# Altium PCB Copy of smarmcuPcb.PcbDoc
Units mil, origin at the board's own origin, x right, y up, seen from the top; angles counter-clockwise.
Board outline 2370 x 1812 mil, 4 copper layers (Top Layer, GND_layer, 3.3V_layer, Bottom Layer), stack 23.756 mil thick; 88 components, 65 nets, 255 pads, 78 vias.
Unrouted connection lines stored in the file: 43.
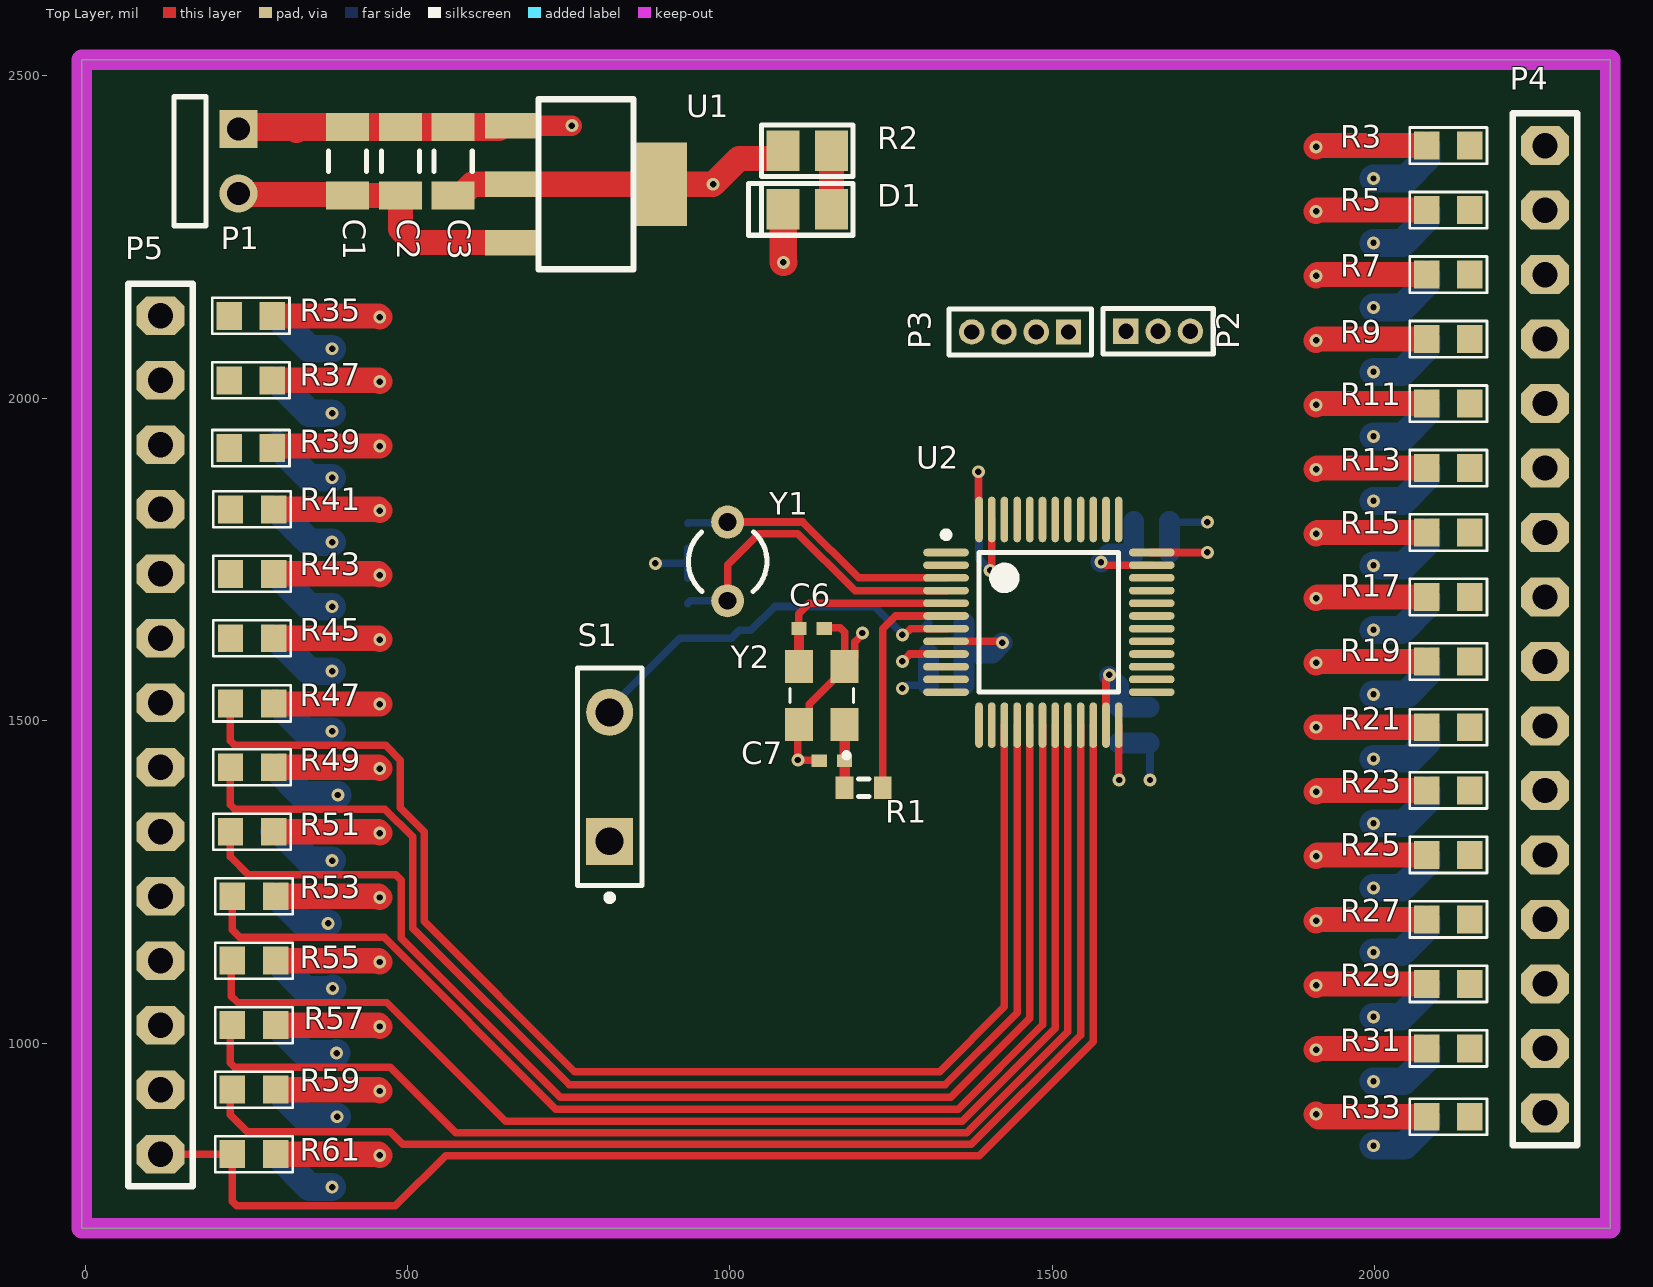
[diagram p0: Top Layer view]
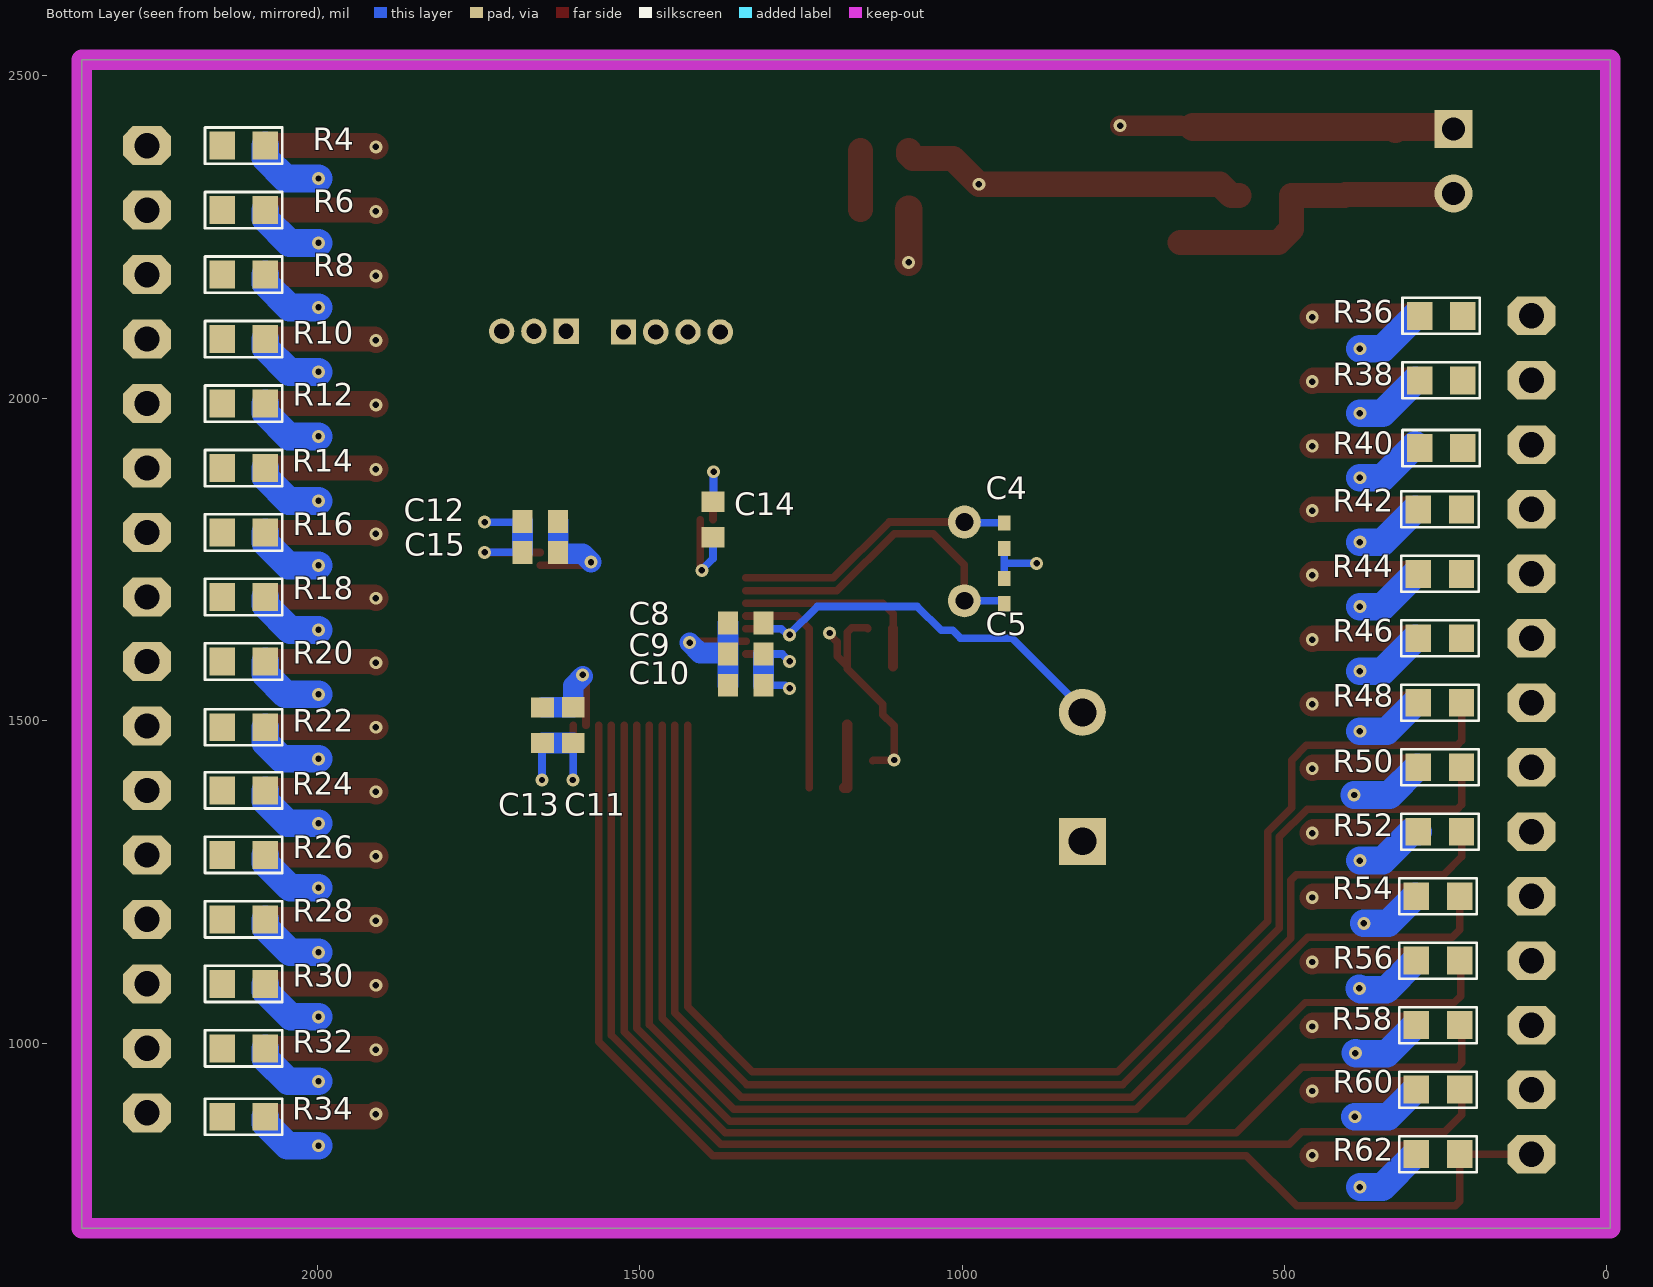
[diagram p1: Bottom Layer view, seen from below]
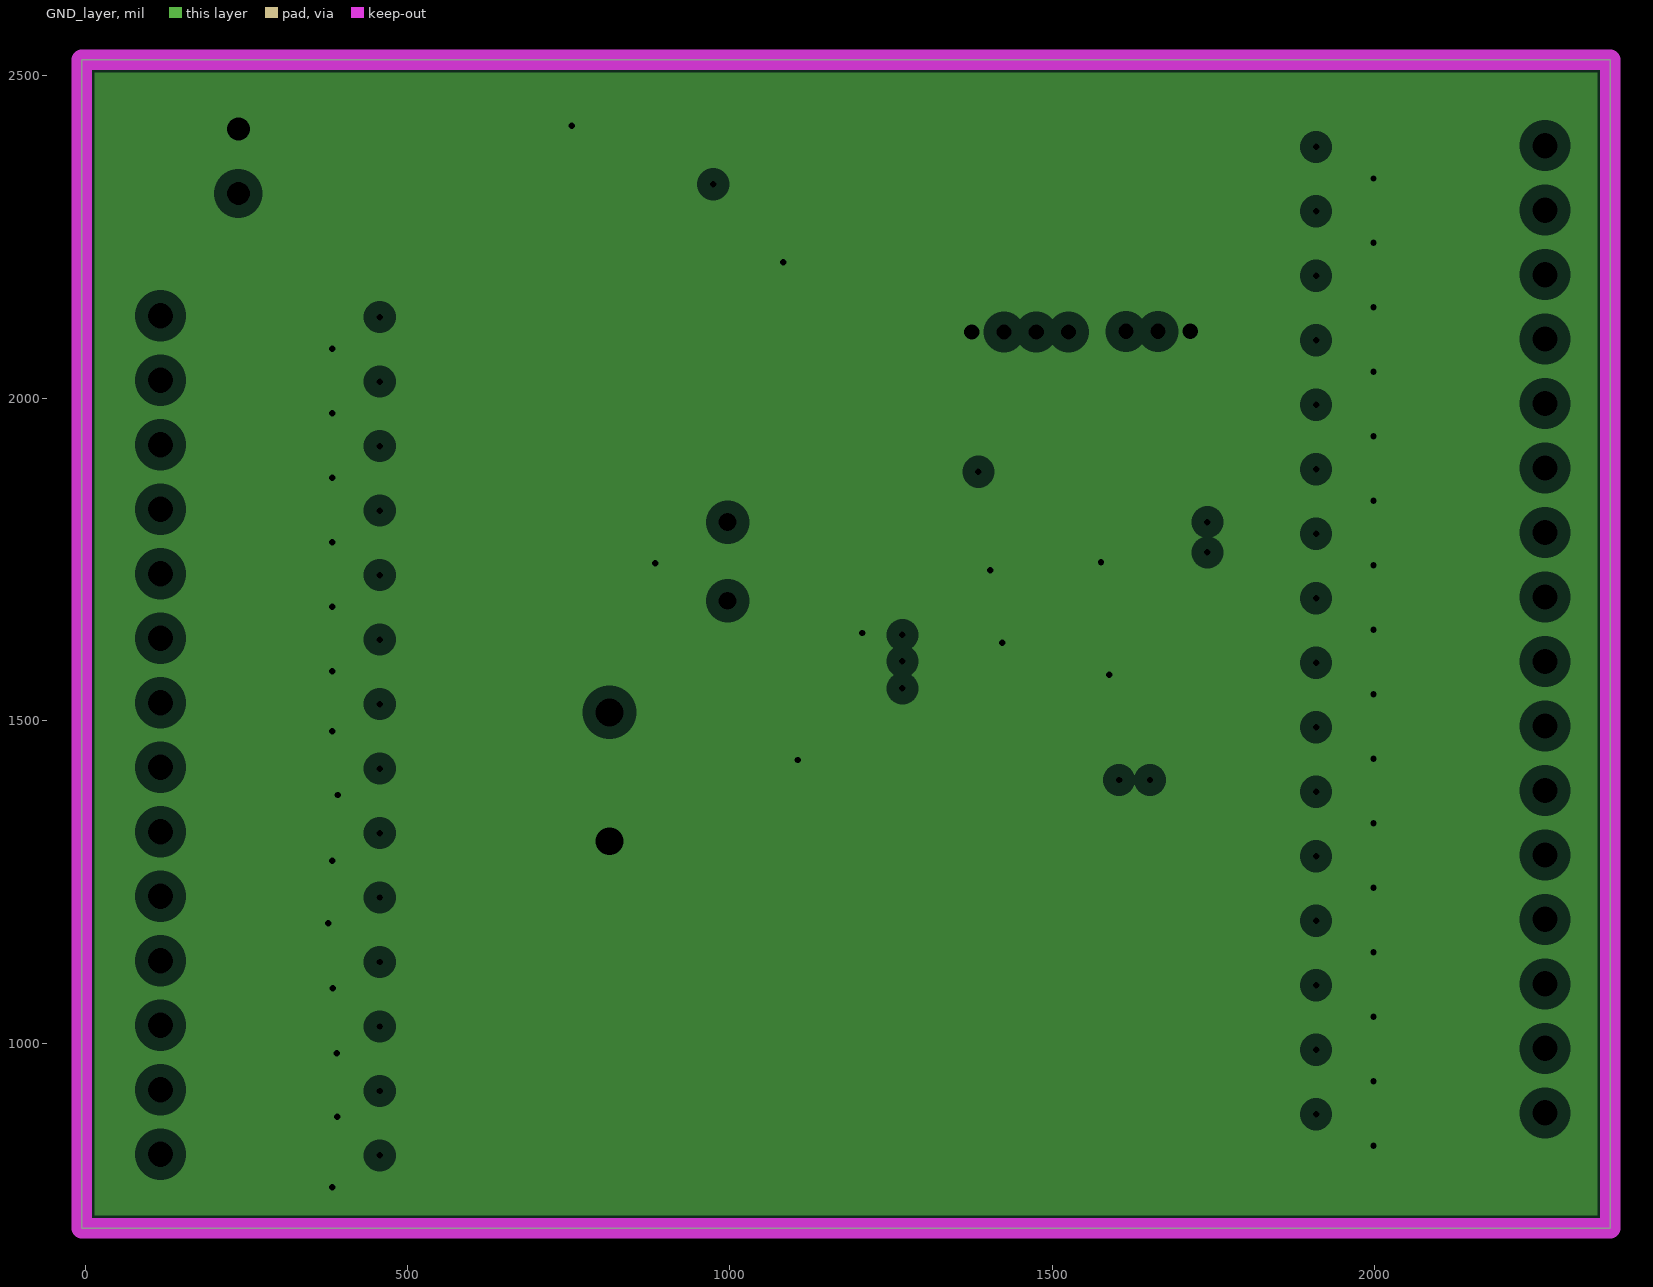
[diagram p2: GND_layer, clearances drawn from the general rule]
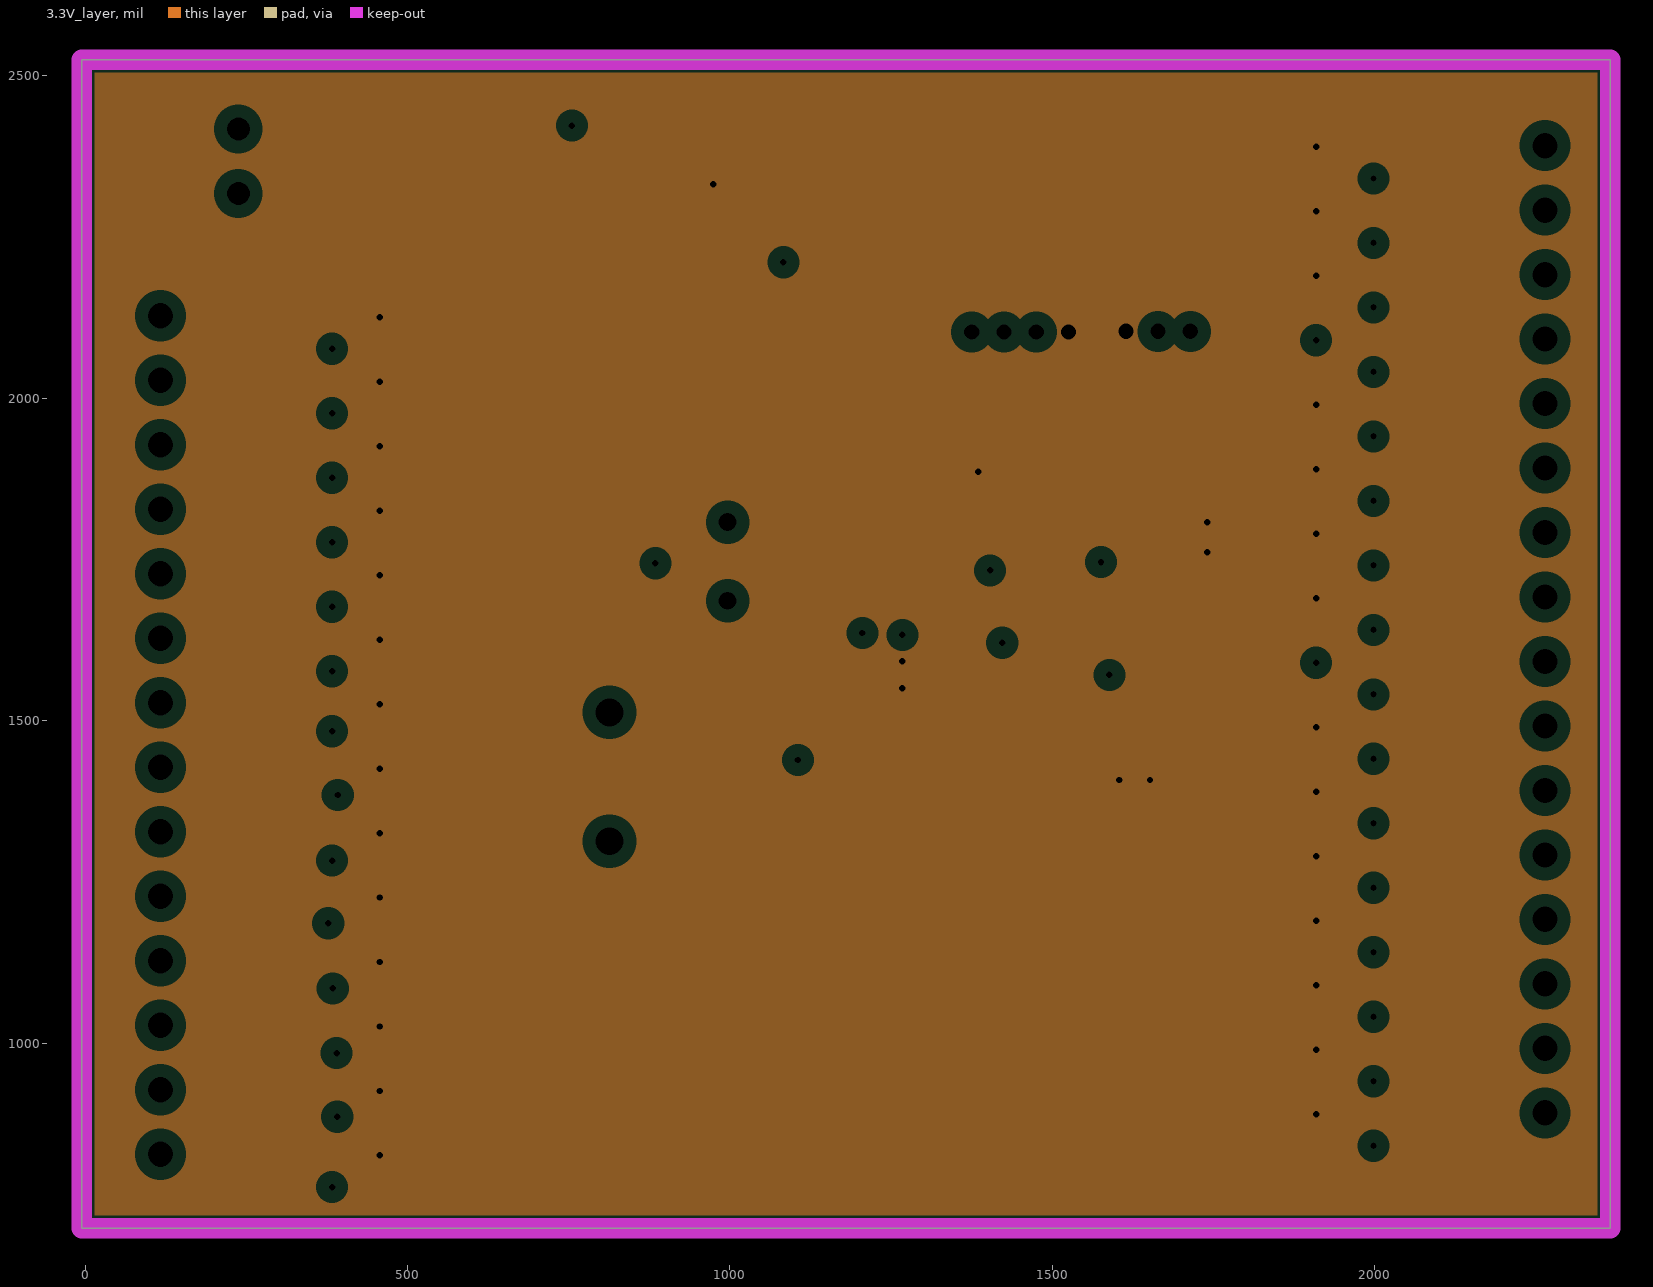
[diagram p3: 3.3V_layer, clearances drawn from the general rule]

## Layer stack, top to bottom
Top Solder: solder mask 0.4, Solder Resist, Dk 3.5
Top Layer: signal copper 1.4
Dielectric 2: prepreg 2.8, PP-006, Dk 4.1
GND_layer: plane copper 1.378, net GND
Dielectric 1: dielectric 12.6, FR-4, Dk 4.8
3.3V_layer: plane copper 1.378, net +3.3V
Dielectric 3: prepreg 2.8, PP-006, Dk 4.1
Bottom Layer: signal copper 1.4
Bottom Solder: solder mask 0.4, Solder Resist, Dk 3.5

## Board outline
-5,713 -5,2525 2365,2525 2365,713

## Design rules (kind name [scope] priority, off if disabled: settings)
Clearance [All] p1: gap=6 ignorepadtopadclearanceinfootprint=FALSE
ComponentClearance IGNORE [InComponent('Y2') vs InComponent('C7')] p1: gap=10 collisioncheckmode=3 verticalgap=10 showdistances=FALSE donotcheckwithout3dbody=TRUE
ComponentClearance ComponentClearance_1 [All] p2: gap=10 collisioncheckmode=3 verticalgap=10 showdistances=FALSE
PlaneClearance [All] p1: clearance=20
PlaneConnect [All] p1: planeconnectstyle=Direct reliefexpansion=20 reliefentries=4 reliefconductorwidth=10 reliefairgap=10
PolygonConnect [All] p1: connectstyle=Direct reliefconductorwidth=10 reliefentries=4 polygonreliefangle="90 Angle" airgapwidth=10
RoutingVias [All] p1: holewidth=10 width=20 viastyle="Through Hole" minholewidth=10 minwidth=20 maxholewidth=28 maxwidth=50
SolderMaskExpansion [All] p1: expansion=4 istentingtop=FALSE
Width [All] p1: maxlimit=43 minlimit=10 preferedwidth=10
27 further rules are at their usual default settings.

## Classes and differential pairs
component class mcu: C4 C5 C6 C7 C8 C9 C10 C11 C12 C13 C14 C15 P2 P3 P4 P5 R1 R3 R4 R5 R6 R7 R8 R9 R10 R11 R12 R13 R14 R15 R16 R17 R18 R19 R20 R21 R22 R23 R24 R25 R26 R27 R28 R29 R30 R31 R32 R33 R34 R35 R36 R37 R38 R39 R40 R41 R42 R43 R44 R45 R46 R47 R48 R49 R50 R51 R52 R53 R54 R55 R56 R57 R58 R59 R60 R61 R62 S1 U2 Y1 Y2
component class PowerSupply: C1 C2 C3 D1 P1 R2 U1

## Components (designator, comment, footprint, x,y, rotation, side; value= is the part's Value field where it differs from the comment)
C1 "tantalum cap" C1206tancap 570.84,2367.69 r270 top value=100uF
C2 "tantalum cap" C1206tancap 489.04,2367.69 r270 top value=10uF
C3 "tantalum cap" C1206tancap 407.23,2367.69 r270 top value=100uF
C4 "Cap Semi" 0402 934.43,1786.89 r90 bottom value=10pF
C5 "Cap Semi" 0402 934.43,1701.21 r270 bottom value=10pF
C6 "Cap Semi" 0402 1126.68,1643.21 r180 top value=10pF
C7 "Cap Semi" 0402 1158.17,1438.21 r0 top value=10pF
C8 "" 1608[0603] 1335.49,1651.69 r180 bottom value=100nF
C9 "Cap Semi" 1608[0603] 1335.43,1603.54 r180 bottom value=10nF
C10 "Cap Semi" 1608[0603] 1335.43,1555.21 r180 bottom value=1uF
C11 "Cap Semi_1" 1608[0603]cap 1602.85,1493.31 r270 bottom value=100nF
C12 "Cap Semi_1" 1608[0603]cap 1654.03,1809.21 r0 bottom value=100nF
C13 "Cap Semi_1" 1608[0603]cap 1650.43,1493.21 r270 bottom value=100nF
C14 "Cap Semi_1" 1608[0603]cap 1386.32,1812.21 r90 bottom value=100nF
C15 "Cap Semi" 1608[0603]cap 1654.03,1761.03 r0 bottom value=4,7uF
D1 "LED" MY_LED_0805 1120,2296 r0 top
P1 "" HDR1X2H3dbody 237.84,2417.69 r270 top
P2 "" MHDR1X3body 1614,2104 r0 top
P3 "" MHDR1X4body 1525,2103 r180 top
P4 "Header 16" MY_FE16 2264,1642 r90 top
P5 "Header 14" MY_FE14 117,1478 r90 top
R1 "Res3" J1-0603 1207.39,1396.21 r0 top value=10R
R2 "330R" MY_0805 1120,2384 r0 top
R3 "1K" MY_0603 2114,2392 r0 top
R4 "1K" MY_0603 2114,2392 r180 bottom
R5 "1K" MY_0603 2114,2292 r0 top
R6 "1K" MY_0603 2114,2292 r180 bottom
R7 "1K" MY_0603 2114,2192 r0 top
R8 "1K" MY_0603 2114,2192 r180 bottom
R9 "1K" MY_0603 2114,2092 r0 top
R10 "1K" MY_0603 2114,2092 r180 bottom
R11 "1K" MY_0603 2114,1992 r0 top
R12 "1K" MY_0603 2114,1992 r180 bottom
R13 "1K" MY_0603 2114,1892 r0 top
R14 "1K" MY_0603 2114,1892 r180 bottom
R15 "1K" MY_0603 2114,1792 r0 top
R16 "1K" MY_0603 2114,1792 r180 bottom
R17 "1K" MY_0603 2114,1692 r0 top
R18 "1K" MY_0603 2114,1692 r180 bottom
R19 "1K" MY_0603 2114,1592 r0 top
R20 "1K" MY_0603 2114,1592 r180 bottom
R21 "1K" MY_0603 2114,1490 r0 top
R22 "1K" MY_0603 2114,1490 r180 bottom
R23 "1K" MY_0603 2114,1392 r0 top
R24 "1K" MY_0603 2114,1392 r180 bottom
R25 "1K" MY_0603 2114,1292 r0 top
R26 "1K" MY_0603 2114,1292 r180 bottom
R27 "1K" MY_0603 2114,1192 r0 top
R28 "1K" MY_0603 2114,1192 r180 bottom
R29 "1K" MY_0603 2114,1092 r0 top
R30 "1K" MY_0603 2114,1092 r180 bottom
R31 "1K" MY_0603 2114,992 r0 top
R32 "1K" MY_0603 2114,992 r180 bottom
R33 "1K" MY_0603 2114,886 r0 top
R34 "1K" MY_0603 2114,886 r180 bottom
R35 "1K" MY_0603 257,2128 r180 top
R36 "1K" MY_0603 257,2128 r0 bottom
R37 "1K" MY_0603 257,2028 r180 top
R38 "1K" MY_0603 257,2028 r0 bottom
R39 "1K" MY_0603 257,1923 r180 top
R40 "1K" MY_0603 257,1923 r0 bottom
R41 "1K" MY_0603 259,1828 r180 top
R42 "1K" MY_0603 259,1828 r0 bottom
R43 "1K" MY_0603 259,1728 r180 top
R44 "1K" MY_0603 259,1728 r0 bottom
R45 "1K" MY_0603 259,1628 r180 top
R46 "1K" MY_0603 259,1628 r0 bottom
R47 "1K" MY_0603 259,1527 r180 top
R48 "1K" MY_0603 259,1528 r0 bottom
R49 "1K" MY_0603 259,1428 r180 top
R50 "1K" MY_0603 259,1428 r0 bottom
R51 "1K" MY_0603 259,1328 r180 top
R52 "1K" MY_0603 259,1328 r0 bottom
R53 "1K" MY_0603 262,1228 r180 top
R54 "1K" MY_0603 262,1228 r0 bottom
R55 "1K" MY_0603 262,1128 r180 top
R56 "1K" MY_0603 262,1128 r0 bottom
R57 "1K" MY_0603 262,1028 r180 top
R58 "1K" MY_0603 262,1028 r0 bottom
R59 "1K" MY_0603 262,928 r180 top
R60 "1K" MY_0603 262,928 r0 bottom
R61 "1K" MY_0603 262,828 r180 top
R62 "1K" MY_0603 262,828 r0 bottom
S1 "" SPST-2_body 813.43,1413.21 r90 top
U1 "" "4 PIN-SOT" 776.02,2200.24 r270 top
U2 "" STM-LQFP48_N 1494.57,1652.76 r0 top
Y1 "XTAL" R38 996.43,1747.21 r0 top
Y2 "ECS-80-12-33-JGN-TR" XTAL_ECS-240-8-33-AGN-TR 1142.43,1539.21 r90 top

## Footprints (in the part's own frame and the unit in brackets; to place one, negate y for a bottom-side part, rotate by r counter-clockwise, add the part's x,y. Pads: shape width x height; smd on the part's side, far side on the other; paste and mask are expansions set on the pad)
"4 PIN-SOT" [mm]
  rect 1x2.1 smd: 0(-1.05,-2.9) 1(-5.65,-2.9) 2(-3.35,-2.9)
  rect 3.3x2.2 smd: 2(-3.35,2.9)
  silkscreen extent -6.7,-1.85 0,1.89, body extent -6.63,-3.63 -0.13,3.37, height 1.61
0402 [mm] "Chip Capacitor, Body 1.0x0.5mm, IPC High Density"
  rect 0.6x0.5 smd: 1(-0.5,0) 2(0.5,0)
  body extent -0.55,-0.3 0.55,0.3, height 1.3
1608[0603] [mm] "Chip Capacitor, Body 1.6x0.8mm, IPC High Density"
  rect 0.8x0.9 smd: 1(-0.7,0) 2(0.7,0)
  body extent -0.87,-0.48 0.87,0.48, height 1.3
1608[0603]cap [mm]
  rect 0.8x0.9 smd: 1(-0.7,0) 2(0.7,0)
  body extent -0.77,-0.4 0.83,0.4, height 0.9
C1206tancap [mm]
  rect 1.1x1.7 smd: 1(-1.35,0) 2(1.35,0)
  silkscreen extent -0.4,-0.75 0.4,0.75, body extent -1.7,-0.9 1.7,0.9, height 1.8
HDR1X2H3dbody [mm]
  rect 1.5x1.5 hole 0.9: 1(0,0)
  round 1.5 hole 0.9: 2(2.54,0)
  silkscreen extent -1.27,-2.54 3.81,-1.27, body extent -1.27,-3.23 3.81,3.12, height 11.19
J1-0603 [mm] "Chip Resistor, Body 1.6x0.8mm, IPC High Density"
  rect 0.7x0.9 smd: 1(-0.75,0) 2(0.75,0)
  silkscreen extent -0.2,-0.35 0.2,0.35, body extent -0.85,-0.48 0.85,0.48, height 0.9
MHDR1X3body [mm]
  rect 1x1 hole 0.6: 1(0,0)
  round 1 hole 0.6: 2(1.27,0) 3(2.54,0)
  silkscreen extent -0.9,-0.9 3.44,0.9, body extent -0.64,-1.2 3.17,1.2, height 5
MHDR1X4body [mm]
  rect 1x1 hole 0.6: 1(0,0)
  round 1 hole 0.6: 2(1.27,0) 3(2.54,0) 4(3.81,0)
  silkscreen extent -0.9,-0.9 4.71,0.9, body extent -0.66,-1.22 4.42,1.28, height 4.61
MY_0603 [mm]
  rect 1x1.1 smd: 1(-0.85,0) 2(0.85,0)
  silkscreen extent -1.52,-0.71 1.52,0.71, body extent -0.8,-0.4 0.8,0.4, height 0.44
MY_0805 [mm]
  rect 1.3x1.6 smd: 1(-0.95,0) 2(0.95,0)
  silkscreen extent -1.8,-1.02 1.8,1.02, body extent -1,-0.62 1,0.63, height 0.59
MY_FE14 [mil]
  oct 60x75 hole 39.37: 1(-650,0) 2(-550,0) 3(-450,0) 4(-350,0) 5(-250,0) 6(-150,0) 7(-50,0) 8(50,0) 9(150,0) 10(250,0) 11(350,0) 12(450,0) 13(550,0) 14(650,0)
  silkscreen extent -700,-50 700,50, body extent -705,-49 705,49, height 335
MY_FE16 [mil]
  oct 60x75 hole 39.37: 1(-750,0) 2(-650,0) 3(-550,0) 4(-450,0) 5(-350,0) 6(-250,0) 7(-150,0) 8(-50,0) 9(50,0) 10(150,0) 11(250,0) 12(350,0) 13(450,0) 14(550,0) 15(650,0) 16(750,0)
  silkscreen extent -800,-50 800,50, body extent -805,-49 805,49, height 335
MY_LED_0805 [mm]
  rect 1.3x1.6 smd: A(0.95,-0.076) K(-0.95,-0.076)
  silkscreen extent -2.31,-1.09 1.8,0.94, body extent -1.06,-0.48 1.01,0.42, height 0.86
R38 [mm] "Crystal, Thru-Hole; 2 Leads; Body 3.1 x 8.2 mm (Dia.xH)"
  round 1.3 hole 0.7: 1(0,1.55) 2(0,-1.55)
  silkscreen extent -1.55,-1.19 1.55,1.17
SPST-2_body [mm]
  rect 1.85x1.85 hole 1.1: 1(-2.54,0)
  round 1.85 hole 1.1: 2(2.54,0)
  silkscreen extent -4.89,-1.27 4.28,1.27, body extent -3.93,-1.75 3.83,1.75, height 5.25
STM-LQFP48_N [mm]
  oval 1.8x0.3 smd: 1(-4.05,2.75) 2(-4.05,2.25) 3(-4.05,1.75) 4(-4.05,1.25) 5(-4.05,0.75) 6(-4.05,0.25) 7(-4.05,-0.25) 8(-4.05,-0.75) 9(-4.05,-1.25) 10(-4.05,-1.75) 11(-4.05,-2.25) 12(-4.05,-2.75) 25(4.05,-2.75) 26(4.05,-2.25) 27(4.05,-1.75) 28(4.05,-1.25) 29(4.05,-0.75) 30(4.05,-0.25) 31(4.05,0.25) 32(4.05,0.75) 33(4.05,1.25) 34(4.05,1.75) 35(4.05,2.25) 36(4.05,2.75)
  oval 0.3x1.8 smd: 13(-2.75,-4.05) 14(-2.25,-4.05) 15(-1.75,-4.05) 16(-1.25,-4.05) 17(-0.75,-4.05) 18(-0.25,-4.05) 19(0.25,-4.05) 20(0.75,-4.05) 21(1.25,-4.05) 22(1.75,-4.05) 23(2.25,-4.05) 24(2.75,-4.05) 37(2.75,4.05) 38(2.25,4.05) 39(1.75,4.05) 40(1.25,4.05) 41(0.75,4.05) 42(0.25,4.05) 43(-0.25,4.05) 44(-0.75,4.05) 45(-1.25,4.05) 46(-1.75,4.05) 47(-2.25,4.05) 48(-2.75,4.05)
  silkscreen extent -4.17,-2.75 2.75,3.57, body extent -4.5,-4.51 4.5,4.49, height 1.56
XTAL_ECS-240-8-33-AGN-TR [mm]
  rect 1.3x1.1 smd: 1(-1.15,-0.9) 2(1.15,-0.9) 3(1.15,0.9) 4(-1.15,0.9)
  silkscreen extent -2.45,-1.25 0.27,1.25

## Part data
C1 C3: library part "Cap Semi_6", "Capacitor (Semiconductor SIM Model)", LatestRevisionDate=29-May-2009, LatestRevisionNote="IPC-7351 Footprint Added.", PackageDescription="Chip Capacitor", PackageReference=C1206, Published=8-Jun-2000, Publisher="Altium Limited"
C2: library part "Cap Semi_5", "Capacitor (Semiconductor SIM Model)", LatestRevisionDate=29-May-2009, LatestRevisionNote="IPC-7351 Footprint Added.", PackageDescription="Chip Capacitor", PackageReference=C1206, Published=8-Jun-2000, Publisher="Altium Limited"
C4 C5 C6 C7 C9 C10 C11 C12 C15: "Capacitor (Semiconductor SIM Model)", LatestRevisionDate=29-May-2009, LatestRevisionNote="IPC-7351 Footprint Added.", PackageDescription="Chip Capacitor", PackageReference=C1206, Published=8-Jun-2000, Publisher="Altium Limited"
C8: library part "Cap Semi", "Capacitor (Semiconductor SIM Model)", LatestRevisionDate=29-May-2009, LatestRevisionNote="IPC-7351 Footprint Added.", PackageDescription="Chip Capacitor", PackageReference=C1206, Published=8-Jun-2000, Publisher="Altium Limited"
C13: library part "Cap Semi_1_2", "Capacitor (Semiconductor SIM Model)", LatestRevisionDate=29-May-2009, LatestRevisionNote="IPC-7351 Footprint Added.", PackageDescription="Chip Capacitor", PackageReference=C1206, Published=8-Jun-2000, Publisher="Altium Limited"
C14: library part "Cap Semi_1_3", "Capacitor (Semiconductor SIM Model)", LatestRevisionDate=29-May-2009, LatestRevisionNote="IPC-7351 Footprint Added.", PackageDescription="Chip Capacitor", PackageReference=C1206, Published=8-Jun-2000, Publisher="Altium Limited"
D1: "Typical INFRARED GaAs LED", ASiD Part Number=LED-AS
P1: library part "Header 2H", "Battery connection", voltage=5V, LatestRevisionDate=17-Jul-2002, LatestRevisionNote="Re-released for DXP Platform.", Publisher="Altium Limited"
P2: library part MHDR1X3, "Header, 3-Pin", LatestRevisionDate=17-Jul-2002, LatestRevisionNote="Re-released for DXP Platform.", Publisher="Altium Limited"
P3: library part MHDR1X4, "Header, 4-Pin", LatestRevisionDate=17-Jul-2002, LatestRevisionNote="Re-released for DXP Platform.", Publisher="Altium Limited"
P4: "Header, 16-Pin", ASiD Part Number="Header 16-AS"
P5: "Header, 14-Pin", ASiD Part Number="Header 14-AS"
R1: "Resistor", LatestRevisionDate=29-May-2009, LatestRevisionNote="IPC-7351 Footprint Added.", PackageDescription="Chip Resistor", PackageReference=J1-0603, Published=8-Jun-2000, Publisher="Altium Limited"
R2 R3 R4 R5 R6 R7 R8 R9 R10 R11 R12 R13 R14 R15 R16 R17 R18 R19 R20 R21 R22 R23 R24 R25 R26 R27 R28 R29 R30 R31 R32 R33 R34 R35 R36 R37 R38 R39 R40 R41 R42 R43 R44 R45 R46 R47 R48 R49 R50 R51 R52 R53 R54 R55 R56 R57 R58 R59 R60 R61 R62: library part Res, "Standard resistor", ASiD Part Number=Res-AS
S1: library part SW-PB, "Switch", LatestRevisionDate=17-Jul-2002, LatestRevisionNote="Re-released for DXP Platform.", PackageDescription="Switch; 2 Leads", PackageReference=SPST-2, Published=24-Mar-1999, Publisher="Altium Limited"
U1: library part lm1117, "The LM1117 is a low dropout voltage regulator with a dropout of / 1.2 V at 800 mA of load current. The LM1117 is available in an / adjustable version, which can set the output voltage from 1.25 to / 13.8 V with only two external resistors. In addition, it is available in / five fixed voltages, 1.8 V, 2.5 V, 3.3 V, and 5 V. / The LM1117 offers current limiting and thermal shutdown. Its / circuit is trimmed to assure output voltage accuracy to within +/−1%", voltage=3.3V
U2: library part STM32F103C8T6, "ARM Cortex-M3 32-bit MCU, 64 KB Flash, 20 KB Internal RAM, 37 I/Os, 48-pin LQFP, -40 to 85 degC, Tray", I/Os (High Current)=37, Operating Frequency(F) (Processor speed) (MHz)=72, Supplier Part Number 1=497-6063-ND, Supply Voltage(Vcc) min (V)=2, A/D Converter="2x12-bit (10 Channel)", ComponentLink1Description="Manufacturer URL", ComponentLink1URL=http://www.st.com/web/en/home.html, ComponentLink2Description=Datasheet, ComponentLink2URL=http://www.st.com/st-web-ui/static/active/en/resource/technical/document/datasheet/CD00161566.pdf, ComponentLink3Description="Package Specification", ComponentLink3URL=http://www.st.com/st-web-ui/static/active/en/resource/technical/document/datasheet/DM00058181.pdf, Core="ARM Cortex-M3", DatasheetVersion="Rev. 16", FLASH Size (Prog) (kB)=64, Internal RAM Size (kB)=20, Mounting Technology="Surface Mount", PackageDescription="48-Pin Low Profile Quad Flat Package, 7 x 7 mm Body, 0.5 mm Pitch", PackageReference=LQFP48, PackageVersion="Rev. 6, 06/2013", Packing=Tray, PartNumber=STM32F103C8T6, Supplier 1=Digi-Key, Supplier 2=Farnell, Supplier 3=Newark, Supplier 4=Newark, Supplier 5=Mouser, Supplier Part Number 2=1447637, Supplier Part Number 3=59M2182, Supplier Part Number 4=57P1222, Supplier Part Number 5=511-STM32F103C8T6
Y1: "Crystal Oscillator", LatestRevisionDate=17-Jul-2002, LatestRevisionNote="Re-released for DXP Platform.", PackageDescription="Crystal, Thru-Hole; 2 Leads; Body 3.1 x 8.2 mm (Dia.xH)", PackageReference=R38, Published=8-Jun-2000, Publisher="Altium Limited"
Y2: "8MHz Â±20ppm Crystal 12pF 400 Ohms 4-SMD, No Lead", Package="SMD-4 ECS International", Availability=Warning, BuyPart=https://www.snapeda.com/parts/ECS-80-12-33-JGN-TR/ECS%20Inc./view-part/4477300/?ref=eda, MF="ECS Inc.", Mouser-Purchase-URL=https://snapeda.com/shop?store=Mouser&id=4477300, MP=ECS-80-12-33-JGN-TR, Price=None, SnapEDA_Link=https://www.snapeda.com/parts/ECS-80-12-33-JGN-TR/ECS%20Inc./view-part/4477300/?ref=snap

## Via types
v1: diameter 20, hole 10, Top Layer to Bottom Layer, 78 vias

## Nets (pads, with @x,y where several pads share a name; then routed paths per layer and width w, separated by ;. In a path a pad name is that pad's centre, name@x,y a point inside that pad or via, vN(x,y) a via of type N, cw(c..) or ccw(c..) an arc to the next point about the centre after c; other vN are vias at no path point)
"32KHz 01": C4.2 U2.3 Y1.1 | length 437.3
  Top Layer w11.8: Y1.1 1113.06,1808.23 1199.63,1721.66 U2.3
  Bottom Layer w11.8: C4.2 935.25,1807.4 995.6,1807.4 Y1.1
"32KHz 02": C5.2 U2.4 Y1.2 | length 515.5
  Top Layer w11.8: Y1.2 996.43,1742.21 1044.43,1790.21 1105.43,1790.21 1189.43,1706.21 1189.91,1706.21 1194.14,1701.97 U2.4
  Bottom Layer w11.8: C5.2 934.43,1682.24 938.37,1686.18 Y1.2
+3.3V: C1.2 C9.2 C10.2 C11.2 C12.2 C13.2 C14.2 C15.2 P2.1 P3.1 R2.1 R3.1 R5.1 R7.1 R11.1 R13.1 R15.1 R17.1 R21.1 R23.1 R25.1 R27.1 R29.1 R31.1 R33.1 R35.1 R37.1 R39.1 R41.1 R43.1 R45.1 R47.1 R49.1 R51.1 R53.1 R55.1 R57.1 R59.1 R61.1 U1.2 U2.9 U2.24 U2.36 U2.48 | length 6098
  Top Layer w11.8: v1(1267.43,1592.21) 1278.76,1603.54 U2.9 ; v1(1385.43,1886.21) 1385.43,1842.63 1386.32,1841.74 U2.48 ; U2.24@1602.85,1493.31 1602.85,1408.78 v1(1603.43,1408.21) ; U2.36 1740.25,1761.03 v1(1740.43,1761.21)
  Top Layer w39: C1.2 582.65,2314.54 600.07,2331.96 661.66,2331.96 661.84,2332.14 973.86,2332.14 v1(974,2332)
  Top Layer w39.02: R39.1@290.64,1925.15 292.61,1925.15 293.46,1926 v1(457,1926) ; R37.1@290.64,2028 455,2028 v1(457,2026) ; R35.1@290.64,2128 455,2128 v1(457,2126) ; R51.1@292.64,1328 455,1328 v1(457,1326) ; R49.1@292.64,1428 455,1428 v1(457,1426) ; R47.1@292.64,1528 292.64,1526 v1(457,1526) ; R45.1@292.64,1628 455,1628 v1(457,1626) ; R43.1@292.64,1728 455,1728 v1(457,1726) ; R41.1@292.64,1828 455,1828 v1(457,1826) ; R61.1 455,828 v1(457,826) ; R59.1 455,928 v1(457,926) ; R57.1 455,1028 v1(457,1026) ; R55.1 455,1128 v1(457,1126) ; R53.1 455,1228 v1(457,1226) ; v1(974,2332) 1014.01,2372.01 1076.52,2372.01 1082.6,2378.09 R2.1 ; v1(1909,890) 1913,886 2080.36,886 2080.36,887.79 R33.1@2080.71,888.15 ; v1(1909,990) 1911,992 R31.1@2080.71,992 ; v1(1909,1090) 1911,1092 R29.1@2080.71,1092 ; v1(1909,1190) 1911,1192 R27.1@2080.71,1192 ; v1(1909,1290) 1911,1292 R25.1@2080.71,1292 ; v1(1909,1390) 1911,1392 R23.1@2080.71,1392 ; v1(1909,1490) R21.1@2080.71,1490 ; v1(1909,1690) 1911,1692 R17.1@2080.71,1692 ; v1(1909,1790) 1911,1792 R15.1@2080.71,1792 ; v1(1909,1890) 1911,1892 R13.1@2080.71,1892 ; v1(1909,1990) 1911,1992 R11.1@2080.71,1992 ; v1(1909,2190) 1911,2192 R7.1@2080.71,2192 ; v1(1909,2290) 1911,2292 R5.1@2080.71,2292 ; v1(1909,2390) 1911,2392 R3.1@2080.71,2392
  Bottom Layer w11.8: v1(1267.43,1550.21) 1269.64,1550.21 1274.64,1555.21 C10.2 ; v1(1267.43,1592.21) 1278.76,1603.54 C9.2 ; v1(1385.43,1886.21) 1385.43,1840.66 C14.2 ; v1@1602.85,1408.78 C11.2 ; C13.2 1651.43,1464.65 v1(1651.43,1408.21) v1@1651.43,1406.21 ; C15.2 1681.77,1761.21 v1(1740.43,1761.21) ; C12.2 1682.59,1808.21 v1@1739.43,1808.21
  Bottom Layer w32: C10.2 C9.2 ; C11.2 C11.2 1650.37,1465.7 C13.2 ; C15.2 C12.2
  other v1: 1740.43,1808.21
+9V: C2.2 C3.2 P1.2 U1.0 | length 485.7
  Top Layer w39: P1.2 239.42,2316.12 405.66,2316.12 C3.2 C2.2 489.04,2262.5 509.72,2241.82 U1.0@661.61,2241.82
BOOT0: P2.2 U2.44
GND: C1.1 C2.1 C3.1 C4.1 C5.1 C6.1 C7.1 C8.1 C9.1 C10.1 C11.1 C12.1 C13.1 C14.1 C15.1 D1.K P1.1 P2.3 P3.4 R4.2 R6.2 R8.2 R10.2 R12.2 R14.2 R16.2 R18.2 R20.2 R22.2 R24.2 R26.2 R28.2 R30.2 R32.2 R34.2 R36.2 R38.2 R40.2 R42.2 R44.2 R46.2 R48.2 R50.2 R52.2 R54.2 R56.2 R58.2 R60.2 R62.2 S1.1 U1.1 U2.8 U2.23 U2.35 U2.47 Y2.2 Y2.4 | length 5102.5
  Top Layer w11.8: C7.1 1137.99,1438.71 1105.93,1438.71 v1(1105.43,1439.21) 1105.43,1492.36 Y2.4 1122.75,1509.68 1122.75,1525.43 1177.86,1580.54 Y2.2 ; C6.1 1147.36,1644.21 1170.95,1644.21 1177.86,1637.29 Y2.2 ; v1(1205.43,1636.21) 1205.43,1633.99 1193.61,1622.17 1193.61,1600.24 Y2.2 ; U2.8 1418.18,1623.23 1420.21,1621.21 v1(1422.43,1621.21) ; v1(1403.43,1733.21) 1403.43,1735.43 1406,1738 U2.47@1406,1811.78 ; v1(1575.43,1746.21) 1577.64,1746.21 1582.51,1741.34 U2.35 ; U2.23 1583.17,1563.73 1588.43,1568.99 v1(1588.43,1571.21)
  Top Layer w32: U1.1@661.84,2422.69 754.69,2422.69 v1(755,2423)
  Top Layer w42.99: C1.1@570.69,2420.69 C1.1 571,2421 U1.1@642,2421
  Top Layer w43: P1.1 240.84,2420.69 330.84,2420.69 ; 327.84,2417.69 330.84,2420.69 ; C3.1 C3.1@407.08,2420.69 ; C1.1@570.69,2420.69 489.04,2420.69 C3.1@407.08,2420.69 ; D1.K 1082.6,2211.4 v1(1083,2211) ; 330.84,2420.69 C3.1@407.08,2420.69
  Bottom Layer w11.8: v1(884.43,1744.21) 884.58,1744.05 934.43,1744.05 ; C5.1 934.43,1744.05 ; C4.1 934.43,1744.05 ; C14.1 1386.32,1751.2 1403.43,1734.09 v1(1403.43,1733.21) ; v1@1588.43,1568.99 v1(1588.43,1571.21) ; C11.1 C11.1@1602.9,1520.82 ; C13.1 C13.1
  Bottom Layer w32: C10.1 C9.1@1363.01,1605.04 ; C9.1 C9.1@1362.98,1605.01 ; C8.1 C9.1@1363.01,1605.04 ; v1(1422.43,1621.21) 1406.48,1605.26 1363.24,1605.26 C9.1@1363.01,1605.04 ; v1(1575.43,1746.21) 1588.53,1759.31 1626.22,1759.31 1626.47,1759.56 C12.1 ; v1@1588.43,1568.99 1602.85,1554.56 C11.1 ; C11.1@1602.9,1520.82 C13.1
  Bottom Layer w43: R52.2 292.62,1327.85 303.15,1327.85 347.75,1283.25 v1(383,1283.25) ; R50.2@294.28,1427.85 337.13,1385 v1(392,1385) ; R48.2@294.28,1527.85 297.28,1527.85 341.33,1483.8 v1(383,1483.8) ; R62.2@297.28,827.85 348.13,777 v1(383,777) ; R60.2@297.28,927.85 339.13,886 v1(391,886) ; R58.2@297.28,1027.85 341.33,983.8 389,983.8 v1(390,984.8) ; R56.2@297.28,1127.85 342.35,1082.77 381.77,1082.77 v1(384,1085) ; R54.2@297.28,1227.85 339.13,1186 v1(377,1186) ; R46.2@297.28,1627.85 348.13,1577 v1(383,1577) ; R44.2@297.28,1727.85 348.13,1677 v1(383,1677) ; R42.2@297.28,1827.85 348.13,1777 v1(383,1777) ; R40.2@297.28,1927.85 348.13,1877 v1(383,1877) ; R38.2@297.28,2027.85 348.13,1977 v1(383,1977) ; R36.2@297.28,2127.85 348.13,2077 v1(383,2077) ; v1(1998,841) 2046,841 2080.54,875.54 R34.2 ; v1(1998,941) 2045,941 2080.54,976.54 R32.2 ; v1(1998,1041) 2041,1041 2080.54,1080.54 R30.2 ; v1(1998,1141) 2042,1141 2080.54,1179.54 R28.2 ; v1(1998,1241) 2042,1241 2080.54,1279.54 R26.2 ; v1(1998,1341) 2046,1341 2080.54,1375.54 R24.2 ; v1(1998,1441) 2055.35,1441 2080.54,1466.19 R22.2 ; v1(1998,1541) 2049,1541 2080.54,1572.54 R20.2 ; v1(1998,1641) 2042,1641 2080.54,1679.54 R18.2 ; v1(1998,1741) 2045,1741 2080.54,1776.54 R16.2 ; v1(1998,1841) 2044,1841 2080.54,1877.54 R14.2 ; v1(1998,1941) 2044,1941 2080.54,1977.54 R12.2 ; v1(1998,2041) 2043,2041 2080.54,2078.54 R10.2 ; v1(1998,2141) 2043,2141 2080.54,2178.54 R8.2 ; v1(1998,2241) 2043,2241 2080.54,2278.54 R6.2 ; v1(1998,2341) 2049,2341 2080.54,2372.54 R4.2
IN/OUT: C7.2 R1.1 Y2.1 | length 97.7
  Top Layer w16: R1.1 C7.2 Y2.1
NetD1_A: D1.A R2.2 | length 91
  Top Layer w39.02: D1.A R2.2
NetR1_2: R1.2 U2.6 | length 353
  Top Layer w11.8: R1.2 1236.91,1642.69 1256.82,1662.6 U2.6
NetR3_2: R3.2 R4.1
NetR5_2: R5.2 R6.1
NetR7_2: R7.2 R8.1
NetR9_2: R9.2 R10.1
NetR11_2: R11.2 R12.1
NetR13_2: R13.2 R14.1
NetR15_2: R15.2 R16.1
NetR17_2: R17.2 R18.1
NetR19_2: R19.2 R20.1
NetR21_2: R21.2 R22.1
NetR23_2: R23.2 R24.1
NetR25_2: R25.2 R26.1
NetR27_2: R27.2 R28.1
NetR29_2: R29.2 R30.1
NetR31_2: R31.2 R32.1
NetR33_2: R33.2 R34.1
NetR35_2: R35.2 R36.1
NetR37_2: R37.2 R38.1
NetR39_2: R39.2 R40.1
NetR41_2: R41.2 R42.1
NetR43_2: R43.2 R44.1
NetR45_2: R45.2 R46.1
NRST: C8.2 S1.2 U2.7 | length 665
  Top Layer w11.8: v1@1268.43,1633.21 1270.64,1633.21 1280.35,1642.91 U2.7
  Bottom Layer w11.8: S1.2@807.43,1513.21 922.43,1628.21 1002.43,1628.21 1014.43,1640.21 1032.43,1640.21 1069.43,1677.21 1224.43,1677.21 1268.43,1633.21 1269.99,1634.78 1272.21,1634.78 1280.35,1642.91 1299.15,1642.91 C8.2
  other v1: 1267.43,1633.21
OUT/IN: C6.2 U2.5 Y2.3 | length 316.4
  Top Layer w11.8: C6.2 1106.99,1665.95 1123.33,1682.28 U2.5
  Top Layer w16: Y2.3 C6.2
PA0: U2.10
PA1: U2.11
PA2: U2.12
PA3: U2.13
PA4: U2.14
PA5: P5.8 R47.2 R48.1 U2.15 | length 2074.1
  Top Layer w11.6: R47.2 225.54,1468.8 232.33,1462 466,1462 489,1439 489,1365 526,1328 526,1189 759,956 1325.4,956 1425.68,1056.28 U2.15
PA6: P5.7 R49.2 R50.1 U2.16 | length 2032.6
  Top Layer w11.6: R49.2 225.54,1369.8 232.33,1363 465,1363 508,1320 508,1178.6 750.6,936 1334,936 1445.36,1047.36 U2.16
PA7: P5.6 R51.2 R52.1 U2.17 | length 1991.2
  Top Layer w11.6: R51.2 225.54,1288.95 253.03,1261.45 481.47,1261.45 490,1252.93 490,1163 737,916 1342.51,916 1465.05,1038.54 U2.17
PA8: U2.29
PA9: U2.30
PA10: U2.31
PA11: U2.32
PA12: U2.33
PA15: U2.38
PB0: P5.5 R53.2 R54.1 U2.18 | length 1942.4
  Top Layer w11.6: R53.2 228.54,1175.8 240.13,1164.2 463.91,1164.2 730.11,898 1354.33,898 1484.73,1028.4 U2.18
PB1: P5.4 R55.2 R56.1 U2.19 | length 1943.4
  Top Layer w11.6: R55.2 227,1126.46 227,1072.8 236.6,1063.2 467.8,1063.2 652,879 1360.22,879 1504.42,1023.2 U2.19
PB2: P5.3 R57.2 R58.1 U2.20 | length 1944.2
  Top Layer w11.6: R57.2 225,1024.46 225,969.8 231.8,963 473,963 575,861 1367.11,861 1524.1,1017.99 U2.20
PB3: U2.39
PB4: U2.40
PB5: U2.41
PB6: U2.42
PB7: U2.43
PB8: U2.45
PB9: U2.46
PB10: P5.2 R59.2 R60.1 U2.21 | length 1928.3
  Top Layer w11.6: R59.2 225.23,924.69 225.23,889.33 251.56,863 473,863 492.6,843.4 1374.4,843.4 1543.79,1012.79 U2.21
PB11: P5.1 R61.2 R62.1 U2.22 | length 2118.7
  Top Layer w11.6: P5.1 R61.2 228.54,754.8 235.33,748 481.2,748 559,825.8 1386.8,825.8 1563.47,1002.47 U2.22
PB12: U2.25
PB13: U2.26
PB14: U2.27
PB15: U2.28
SWCLK: P3.3 U2.37
SWDIO: P3.2 U2.34
pads on no net: P4.1 P4.2 P4.3 P4.4 P4.5 P4.6 P4.7 P4.8 P4.9 P4.10 P4.11 P4.12 P4.13 P4.14 P4.15 P4.16 P5.9 P5.10 P5.11 P5.12 P5.13 P5.14 R9.1 R19.1 U2.1 U2.2
copper on no net: | length 345.1
  Top Layer w39.02: v1(1909,1590) 1911,1592 2080.71,1592 ; v1(1909,2090) 1911,2092 2080.71,2092

## Polygon pours and split planes (outlines as drawn)
GND on GND_layer (split plane): 2344.9,733.1 15.1,733.1 15.1,2504.9 2344.9,2504.9
+3.3V on 3.3V_layer (split plane): 2344.9,733.1 15.1,733.1 15.1,2504.9 2344.9,2504.9

## Keep-outs
Keep-Out Layer:
  the board outline again, w32

## Dimensions
-5,713 to -5,713 on Mechanical 15
-5,713 to -5,713 on Mechanical 15